# Altium PCB 2_SLOT_PCB.PcbDoc
Units mil, origin at the board's own origin, x right, y up, seen from the top; angles counter-clockwise.
Board outline 1875.11 x 1046.37 mil, 2 copper layers (Side A (Top), Side B (Bottom)); 13 components, 11 nets, 75 pads, 23 vias.
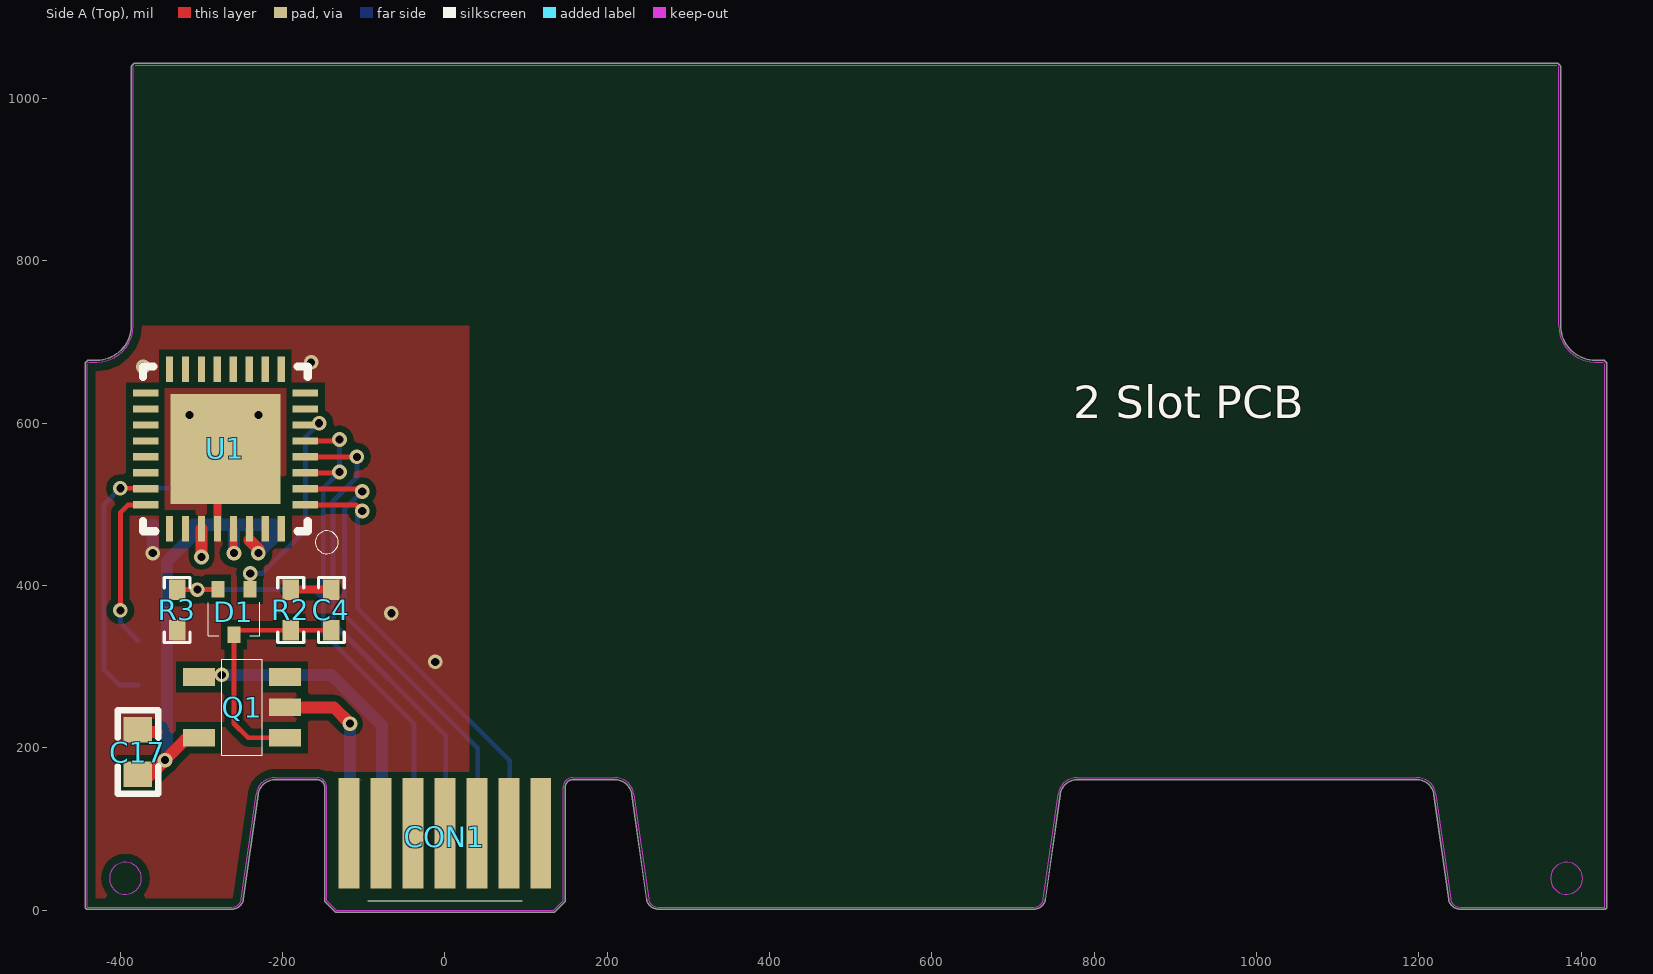
[diagram p0: Side A (Top) view]
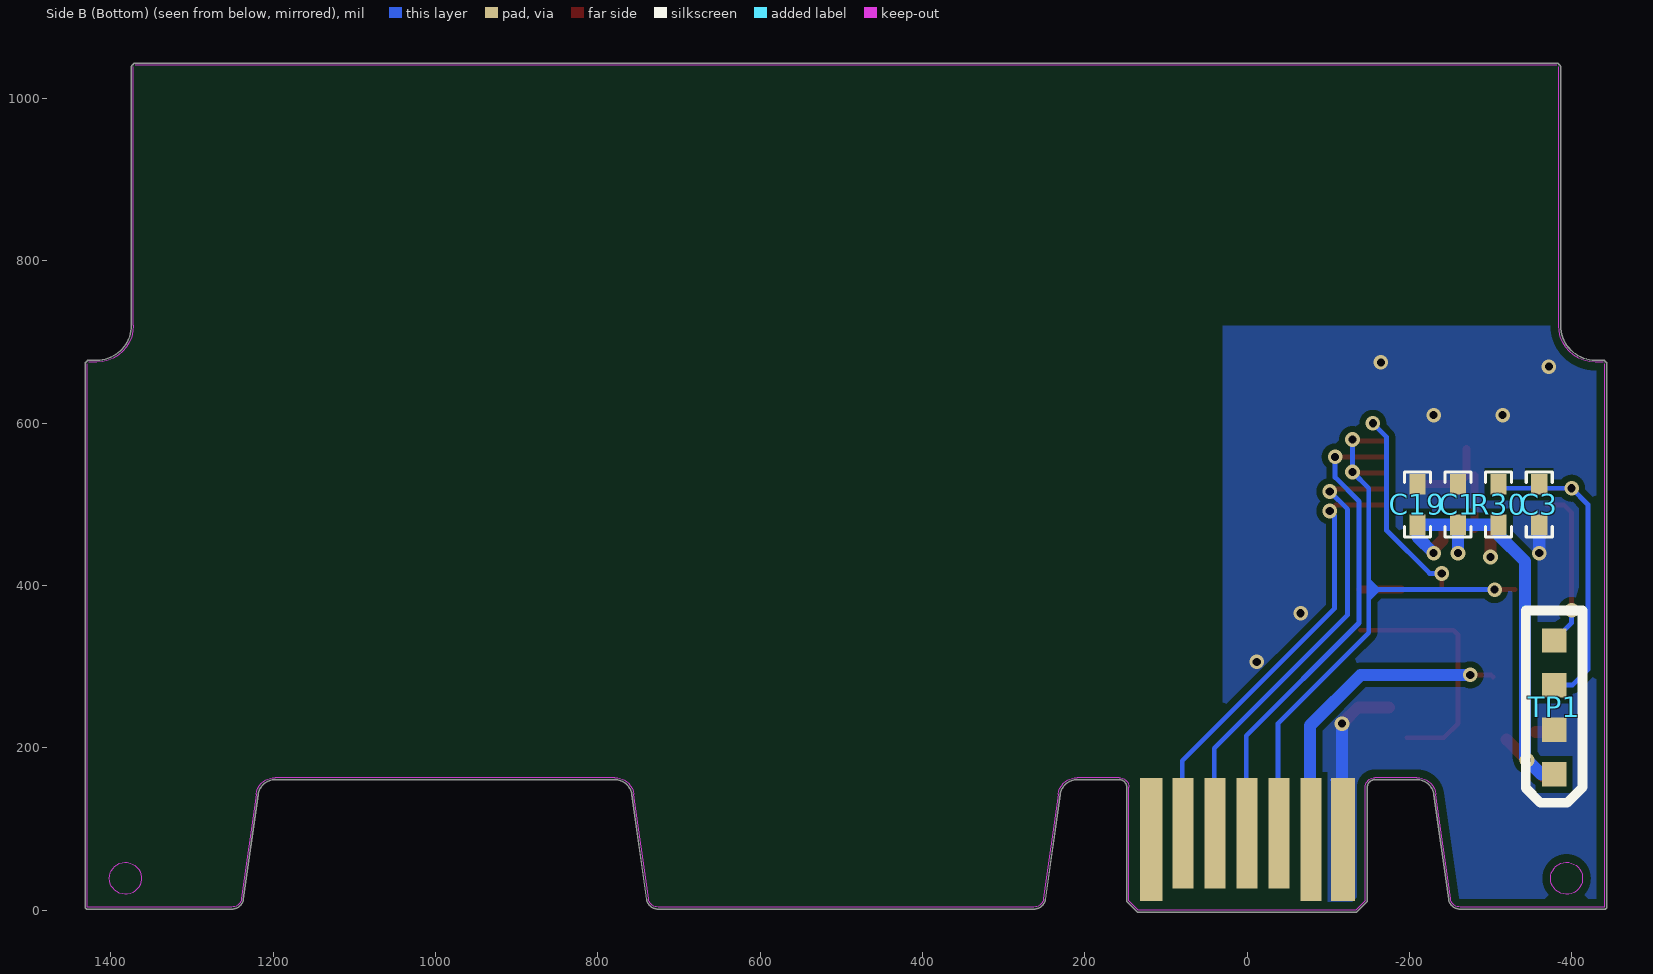
[diagram p1: Side B (Bottom) view, seen from below]

## Layer stack, top to bottom
Side A (Top): signal copper 1.4
Dielectric: core 12.6, FR-4, Dk 4.8
Side B (Bottom): signal copper 1.4

## Board outline
-440.95,1.42 -262.48,1.42 ccw(c-262.48,3.94) -262.46,1.42 ccw(c-262.48,15.75) -248.29,13.75 ccw(c-250.79,14.1) -248.29,13.77 -230.17,142.69 ccw(c-232.66,143.05) -230.17,142.7 cw(c-209.27,139.76) -230.17,142.72 cw(c-209.27,139.76) -209.29,160.87 ccw(c-209.27,163.39) -209.27,160.87 -157.48,160.87 cw(c-157.48,151.57) -148.18,151.57 ccw(c-145.67,151.57) -148.18,151.55 -148.18,11.81 ccw(c-145.67,11.81) -147.45,10.03 -135.64,-1.78 ccw(c-133.86,0) -133.86,-2.51 133.86,-2.51 ccw(c133.86,0) 135.64,-1.78 147.45,10.03 ccw(c145.67,11.81) 148.18,11.81 148.18,151.57 cw(c157.48,151.57) 157.48,160.87 209.27,160.87 ccw(c209.27,163.39) 209.29,160.87 ccw(c209.27,139.76) 209.27,160.87 209.29,160.87 cw(c209.27,139.76) 230.17,142.72 cw(c209.27,139.76) 230.17,142.7 230.17,142.69 248.29,13.77 248.29,13.75 ccw(c262.48,15.75) 262.46,1.42 ccw(c262.48,15.75) 262.48,1.42 725.71,1.42 ccw(c725.71,3.94) 725.73,1.42 ccw(c725.71,15.75) 739.89,13.75 ccw(c737.4,14.1) 739.9,13.77 758.02,142.7 ccw(c755.53,143.05) 758.02,142.73 cw(c778.92,139.76) 778.9,160.87 ccw(c778.92,163.39) 778.92,160.87 1197.46,160.87 ccw(c1197.46,163.39) 1197.48,160.87 ccw(c1197.46,139.76) 1197.46,160.87 1197.48,160.87 cw(c1197.46,139.76) 1218.36,142.72 cw(c1197.46,139.76) 1218.36,142.7 1218.36,142.69 cw(c1220.85,143.05) 1218.36,142.7 cw(c1220.85,143.05) 1218.36,142.72 1218.36,142.69 1236.48,13.78 1236.48,13.75 cw(c1238.97,14.1) 1236.48,13.78 1236.48,13.75 ccw(c1250.67,15.75) 1250.65,1.42 ccw(c1250.67,3.94) 1250.67,1.42 1429.13,1.42 ccw(c1429.13,3.94) 1431.65,3.94 1431.65,673.29 ccw(c1429.13,673.29) 1429.63,675.76 ccw(c1427.17,675.26) 1427.17,677.77 1417.32,677.77 cw(c1417.32,720.53) 1374.56,720.53 1374.56,1039.37 ccw(c1372.05,1039.37) 1372.54,1041.84 ccw(c1370.08,1041.34) 1370.08,1043.85 -381.89,1043.85 ccw(c-381.89,1041.34) -384.36,1041.84 ccw(c-383.86,1039.37) -386.37,1039.37 -386.37,720.53 cw(c-429.13,720.53) -429.13,677.77 -438.98,677.77 ccw(c-438.98,675.26) -441.44,675.76 ccw(c-440.95,673.29) -443.46,673.29 -443.46,3.94 ccw(c-440.95,3.94)

## Design rules (kind name [scope] priority, off if disabled: settings)
Clearance Clearance_polygon [InPolygon] p1: gap=8
Clearance [All] p2: gap=4
DiffPairsRouting [All] p1: maxlimit=8 minlimit=4 mostfreqgap=4 maxuncoupledlength=500
HoleToHoleClearance [All] p1: gap=6 allowstackedmicrovias=TRUE
MinimumSolderMaskSliver [All] p1: minsoldermaskwidth=0
PlaneConnect [All] p1: planeconnectstyle=Relief reliefexpansion=20 reliefentries=4 reliefconductorwidth=20 reliefairgap=10
PolygonConnect PolygonConnect_via [IsVia] p1: connectstyle=Direct reliefconductorwidth=10 reliefentries=4 polygonreliefangle="90 Angle" airgapwidth=10
PolygonConnect [All] p2: connectstyle=Direct reliefconductorwidth=20 reliefentries=4 polygonreliefangle="90 Angle" airgapwidth=15
RoutingVias [All] p1: holewidth=10 width=18 viastyle="Through Hole" minholewidth=10 minwidth=18 maxholewidth=248.03 maxwidth=65
SilkToSilkClearance [All] p1: silktosilkclearance=0
SilkToSolderMaskClearance [IsPad] p1: minsilkscreentomaskgap=1 clearancetoexposedcopper=TRUE
SolderMaskExpansion [All] p1: expansion=4
Width Width_gnd [InNet('GND')] p1: maxlimit=100 minlimit=10 preferedwidth=15
Width Width_5V [(InNet('-5V') OR InNet('5V') OR InNet('5V_B') OR InNet('5V_HUB') OR InNet('5V_ICL7660') OR InNet('5V_ID') OR InNet('5V_MSP') OR InNet('5V_SN') OR InNet('5V_USBT'))] p2: maxlimit=15 minlimit=12 preferedwidth=12
Width Width_3V3 [(InNet('3V3') OR InNet('3V3_B') OR InNet('3V3_HUB') OR InNet('3V3_MSP') OR InNet('4.2V'))] p3: maxlimit=100 minlimit=10 preferedwidth=10
Width [All] p4: maxlimit=100 minlimit=6 preferedwidth=6 checkconnectedcopper=TRUE
22 further rules are at their usual default settings.

## Components (designator, comment, footprint, x,y, rotation, side; value= is the part's Value field where it differs from the comment)
C1 "Cap" 0402 -260,500 r270 bottom
C3 "Cap" 0402 -360,500 r90 bottom
C4 "Cap" 0402 -140,370 r270 top
C17 "Cap" 0603 -378.41,222.44 r270 top
C19 "Cap" 0402 -210,500 r270 bottom
CON1 "" edge-connector-0.8*1.0 0,12 r0 top
D1 "Dual Diode (common cath)" SOT-523 -260,370 r180 top
Q1 "RT9702/A" SOT-23-5 -250,250 r90 top
R2 "Res1" 0402 -190,370 r90 top
R3 "Res1" 0402 -330,370 r270 top
R30 "Res1" 0402 -310,500 r270 bottom
TP1 "" "header 4x1 30*30-55mil" -378.41,167.44 r90 bottom locked
U1 "MSP430G2553" QFN-32-5x5 -270.47,568.43 r180 top locked

## Footprints (in the part's own frame and the unit in brackets; to place one, negate y for a bottom-side part, rotate by r counter-clockwise, add the part's x,y. Pads: shape width x height; smd on the part's side, far side on the other; paste and mask are expansions set on the pad)
0402 [mil] "Chip Capacitor, Body 1.0x0.5mm, IPC High Density"
  rect 25x20 smd: 1(-25,0) 2(25,0)
  silkscreen extent -40,-16 40,16, body extent -40,-16 40,16, height 20
0603 [mm]
  rect 0.8x0.9 smd: 1(0,0) 2(1.397,0)
  silkscreen extent -0.61,-0.64 2.01,0.64, body extent -0.69,-0.71 2.06,0.71, height 1
edge-connector-0.8*1.0 [mm]
  rect 0.65x3.45 smd mask+0.07: 1(-3,2.102) 2(-2,2.102) 3(-1,2.102) 4(0,2.102) 5(1,2.102) 6(2,2.102) 7(3,2.102)
  rect 0.7x3.85 smd far side mask+0.07: 8(3,1.903)
  rect 0.65x3.45 smd far side mask+0.07: 9(2,2.102) 10(1,2.102) 11(0,2.102) 12(-1,2.102)
  rect 0.65x3.85 smd far side mask+0.07: 13(-2,1.903)
  rect 0.75x3.85 smd far side mask+0.07: 14(-3,1.903)
  Keep-Out Layer lines w0.013: -2.7,-0.3 2.701,-0.3
  silkscreen extent -2.41,0 2.41,0
"header 4x1 30*30-55mil" [mil]
  rect 30x30 smd: 1(0,0) 2(55,0) 3(110,0) 4(165,0)
  silkscreen extent -35,-35 202,35
QFN-32-5x5 [mm]
  rect 3.45x3.45 smd: 0(0,0)
  rect 0.8x0.23 smd: 1(-2.5,1.75) 2(-2.5,1.25) 3(-2.5,0.75) 4(-2.5,0.25) 5(-2.5,-0.25) 6(-2.5,-0.75) 7(-2.5,-1.25) 8(-2.5,-1.75) 17(2.5,-1.75) 18(2.5,-1.25) 19(2.5,-0.75) 20(2.5,-0.25) 21(2.5,0.25) 22(2.5,0.75) 23(2.5,1.25) 24(2.5,1.75)
  rect 0.23x0.8 smd: 9(-1.745,-2.5) 10(-1.246,-2.5) 11(-0.746,-2.5) 12(-0.247,-2.5) 13(0.252,-2.5) 14(0.751,-2.5) 15(1.251,-2.5) 16(1.75,-2.5) 25(1.75,2.5) 26(1.25,2.5) 27(0.75,2.5) 28(0.25,2.5) 29(-0.25,2.5) 30(-0.75,2.5) 31(-1.25,2.5) 32(-1.75,2.5)
  silkscreen extent -3.53,-2.58 2.57,3.28
SOT-23-5 [mm]
  rect 0.55x1 smd: 1(-0.95,-1.35) 2(0,-1.35) 3(0.95,-1.35) 4(0.95,1.35) 5(-0.95,1.35)
  silkscreen extent -1.5,-0.64 1.5,0.64, body extent -1.52,-1.91 1.52,1.91, height 1.5
SOT-523 [mm]
  rect 0.4x0.51 smd: 1(-0.5,-0.65) 2(0.5,-0.65) 3(0,0.777)
  silkscreen extent -0.8,-0.24 0.8,0.8, body extent -0.86,-0.89 0.86,1.04, height 0.9

## Part data
C1 C3 C4 C17 C19: "Capacitor"
CON1: library part NP_EdgeConnector-2*7, "Module interface"
D1: "BAS40-05T"
Q1: "RICHTEK RT9702/A"
R2 R3 R30: "Resistor"
TP1: library part "Header 4", "Down Load Interface"

## Via types
v1: diameter 18, hole 10, Side A (Top) to Side B (Bottom), 12 vias
v2: diameter 18, hole 10, Side A (Top) to Side B (Bottom), tented both sides, 11 vias

## Nets (pads, with @x,y where several pads share a name; then routed paths per layer and width w, separated by ;. In a path a pad name is that pad's centre, name@x,y a point inside that pad or via, vN(x,y) a via of type N, cw(c..) or ccw(c..) an arc to the next point about the centre after c; other vN are vias at no path point)
3V3_IN: CON1.13 Q1.4 | length 391.6
  Side A (Top) w6: Q1.4 -300.55,290 v2(-275,290)
  Side B (Bottom) w15: v2(-275,290) -140,290 -77.71,227.71 CON1.13@-77.71,88.46
CS: CON1.12 D1.2 R3.1 U1.3 U1.5 | length 829.2
  Side A (Top) w6: R3.1 v2(-305.14,395) -280.28,395 D1.2 ; U1.3 -131.1,538.9 v2(-130,540) ; U1.5 -131.73,578.27 v2(-130,580)
  Side B (Bottom) w6: v2(-305.14,395) -150,395 ; v2(-130,580) v2(-130,540) -150,520 -150,342 -38.34,230.34 CON1.12@-38.34,96.31
GND: C1.1 C3.1 C4.1 C17.1 C19.1 CON1.14 Q1.2 R2.2 R3.2 TP1.2 U1.0 U1.27 U1.28 | length 512.6
  Side A (Top) w10: U1.28 U1.0@-280.32,535.47 ; U1.0 -270.47,535.47 -260,525 U1.0@-210,525 ; R2.2 C4.1
  Side A (Top) w15: C17.1@-377.41,219.49 -355.51,219.49 ; v1(-300,435.31) U1.27 ; -175,250 -137.08,250 v1(-117.08,230)
  Side B (Bottom) w15: v1(-360,440) C3.1 ; CON1.14@-117.08,88.47 v1(-117.08,230)
  other v1: -12,306 -66,366 -315,610 -230,610 -371.85,669.8 -165,675
MSP_3V3: C1.2 C17.2 C19.2 Q1.5 R30.2 TP1.1 U1.29 U1.30 | length 650.7
  Side A (Top) w10: v2@-260.63,440.63 U1.29 ; U1.30@-240.94,455.94 U1.30
  Side A (Top) w15: C17.2@-365.16,164.84 Q1.5@-320,210 ; v2@-260.63,440.63 v2(-260,440) ; U1.30@-240.94,455.94 -230,445 v2(-230,440)
  Side B (Bottom) w15: TP1.1 -362.91,167.44 v1@-343.41,186.94 ; v1@-342.52,187.84 -342.52,430 -310,462.52 R30.2 C1.2 ; v2(-260,440) C1.2 ; v2(-230,440) -210,460 C19.2 C1.2
  other v1: -345,185
NetC4_2: C4.2 D1.3 Q1.1 R2.1 | length 302.1
  Side A (Top) w6: Q1.1 -242.6,212.6 -260,230 D1.3 -254.41,345 R2.1 C4.2
PWR_HOLD: D1.1 U1.6 | length 248.5
  Side A (Top) w6: D1.1 -240,395.91 v1(-240,415)
  Side B (Bottom) w6: v1(-240,415) -225,415 -172.05,467.95 -172.05,582.95 v1(-155,600)
RST: C3.2 R30.1 TP1.3 U1.23 | length 404.7
  Side A (Top) w6: v2(-400,520) -369.68,520 U1.23
  Side B (Bottom) w6: TP1.3 -400.85,277.44 -420,296.59 -420,500 v2(-400,520) -315,520 R30.1
SIMO: CON1.10 U1.2 | length 568.3
  Side A (Top) w6: U1.2 -105.21,519.21 v2(-102,516)
  Side B (Bottom) w6: v2(-102,516) -124,494 -124,364 40.4,199.6 CON1.10@40.4,96.31
SOMI: CON1.9 U1.1 | length 549.1
  Side A (Top) w6: U1.1 -109.53,499.53 v2(-102,492)
  Side B (Bottom) w6: v2(-102,492) -108,486 -108,372 79.77,184.23 CON1.9@79.77,96.31
SPI_CLK: CON1.11 U1.4 | length 595.5
  Side A (Top) w6: U1.4 v2(-108.58,558.58)
  Side B (Bottom) w6: v2(-108.58,558.58) -108.58,533.42 -138,504 -138,354 1.03,214.97 CON1.11@1.03,96.31
TEST: TP1.4 U1.24 | length 201.5
  Side A (Top) w6: v2(-400,369.44) -400,490 -390.47,499.53 U1.24
  Side B (Bottom) w6: v2(-400,369.44) -400,354.03 TP1.4
pads on no net: CON1.1 CON1.2 CON1.3 CON1.4 CON1.5 CON1.6 CON1.7 CON1.8 Q1.3 U1.7 U1.8 U1.9 U1.10 U1.11 U1.12 U1.13 U1.14 U1.15 U1.16 U1.17 U1.18 U1.19 U1.20 U1.21 U1.22 U1.25 U1.26 U1.31 U1.32

## Polygon pours and split planes (outlines as drawn)
GND on Side B (Bottom) "GND-No Net" (solid, remove dead copper, pour order 6): -450,720 30,720 30,-36 -438,-36 -450,-24 -450,720
GND on Side A (Top) "GND-No Net" (solid, remove dead copper, pour order 4): -450,720 30,720 30,0 -450,0 -450,720

## Keep-outs
Keep-Out Layer:
  circle w0.5: c1381.89,39.37 r19.69
  circle w0.5: c-393.7,39.37 r19.69
  lines w0.5: -440.95,673.29 -440.95,3.94 -262.48,3.94 ccw(c-262.48,15.75) -250.79,14.1 -232.66,143.05 cw(c-209.27,139.76) -209.27,163.39 -157.48,163.39 cw(c-157.48,151.57) -145.67,151.57 -145.67,11.81 -133.86,0 133.86,0 145.67,11.81 145.67,151.57 cw(c157.48,151.57) 157.48,163.39 209.27,163.39 cw(c209.27,139.76) 232.66,143.05 250.79,14.1 ccw(c262.48,15.75) 262.48,3.94 725.71,3.94 ccw(c725.71,15.75) 737.4,14.1 755.53,143.05 cw(c778.92,139.76) 778.92,163.39 1197.46,163.39 cw(c1197.46,139.76) 1220.85,143.05 1238.97,14.1 ccw(c1250.67,15.75) 1250.67,3.94 1429.13,3.94 1429.13,673.29 ; -438.98,675.26 -429.13,675.26 ccw(c-429.13,720.53) -383.86,720.53 -383.86,1039.37 ; -381.89,1041.34 1370.08,1041.34 ; 1372.05,1039.37 1372.05,720.53 ccw(c1417.32,720.53) 1417.32,675.26 1427.17,675.26

## Other copper
Side A (Top):
  pour cut-out: -157.48,171.64 -157.3,171.81 -137.87,171.81 -137.87,169.99 -138,169.86 -138,138 -144,132 -156,132 -156,170.28 -157.35,171.64
Side B (Bottom):
  rectangle net GND: -128.77,159.45 -102,162
  region net CS: -150,410 -165,395 -150,380
  region: -348.19,521.65 -351.54,525

## Silkscreen, mask and mechanical layers (free items; w line width, h text height)
Top Overlay:
  text "2 Slot PCB" at 774,606 h40
Mechanical 1:
  drawing of 1994 lines, arcs and shapes, not listed
Mechanical 3:
  drawing of 1411 lines, arcs and shapes, not listed